# Altium PCB S4V_Motor_Driver_Board_V1.0_PCB.PcbDoc
Units mm, origin at the board's own origin, x right, y up, seen from the top; angles counter-clockwise.
Board outline 50 x 47.75 mm, 2 copper layers (Top Layer, Bottom Layer); 56 components, 38 nets, 268 pads, 245 vias.
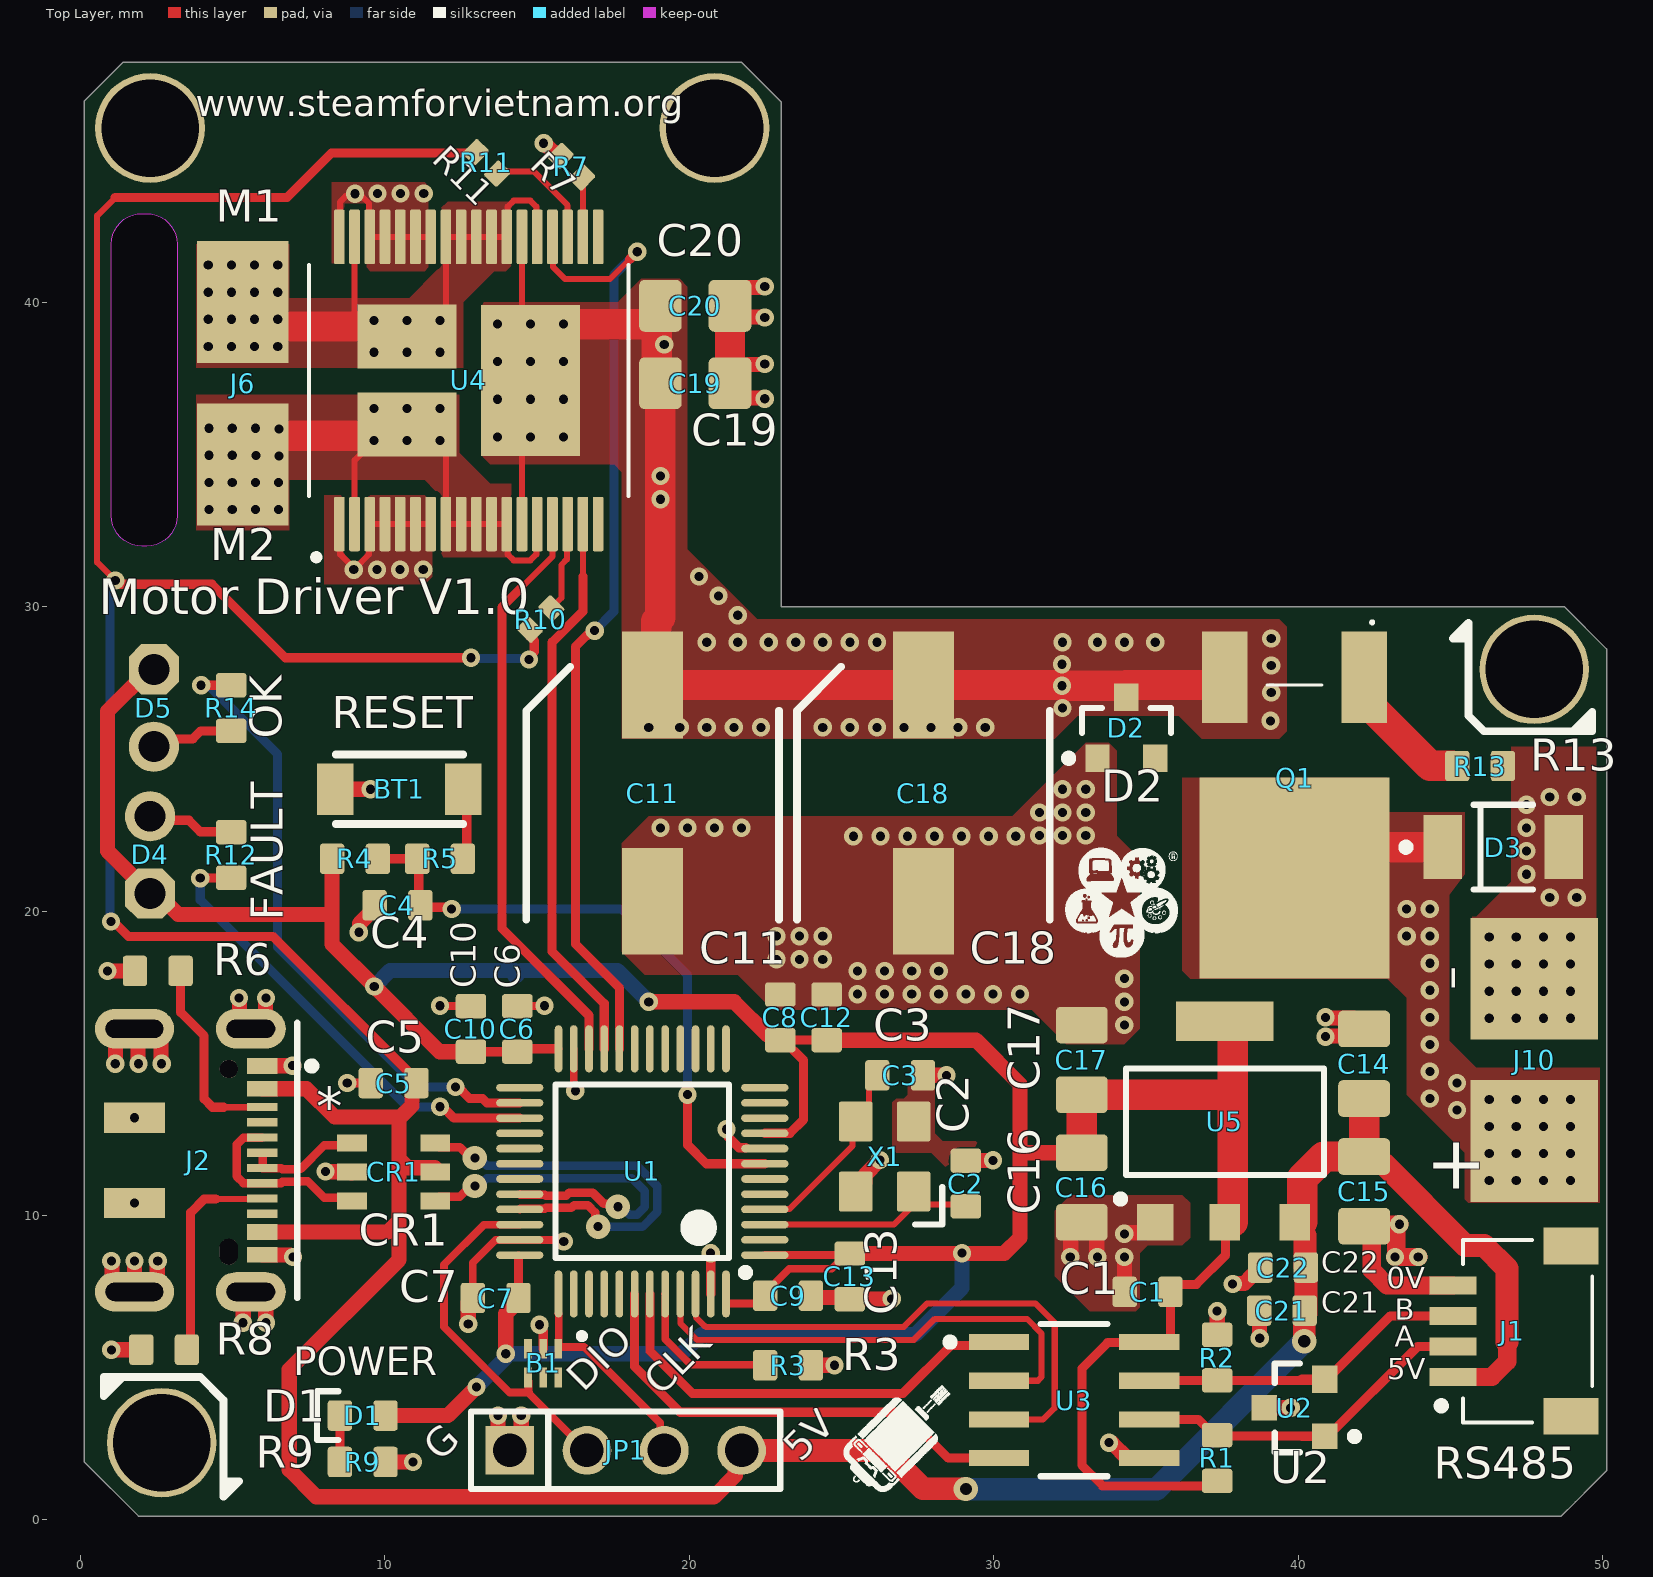
[diagram p0: Top Layer view]
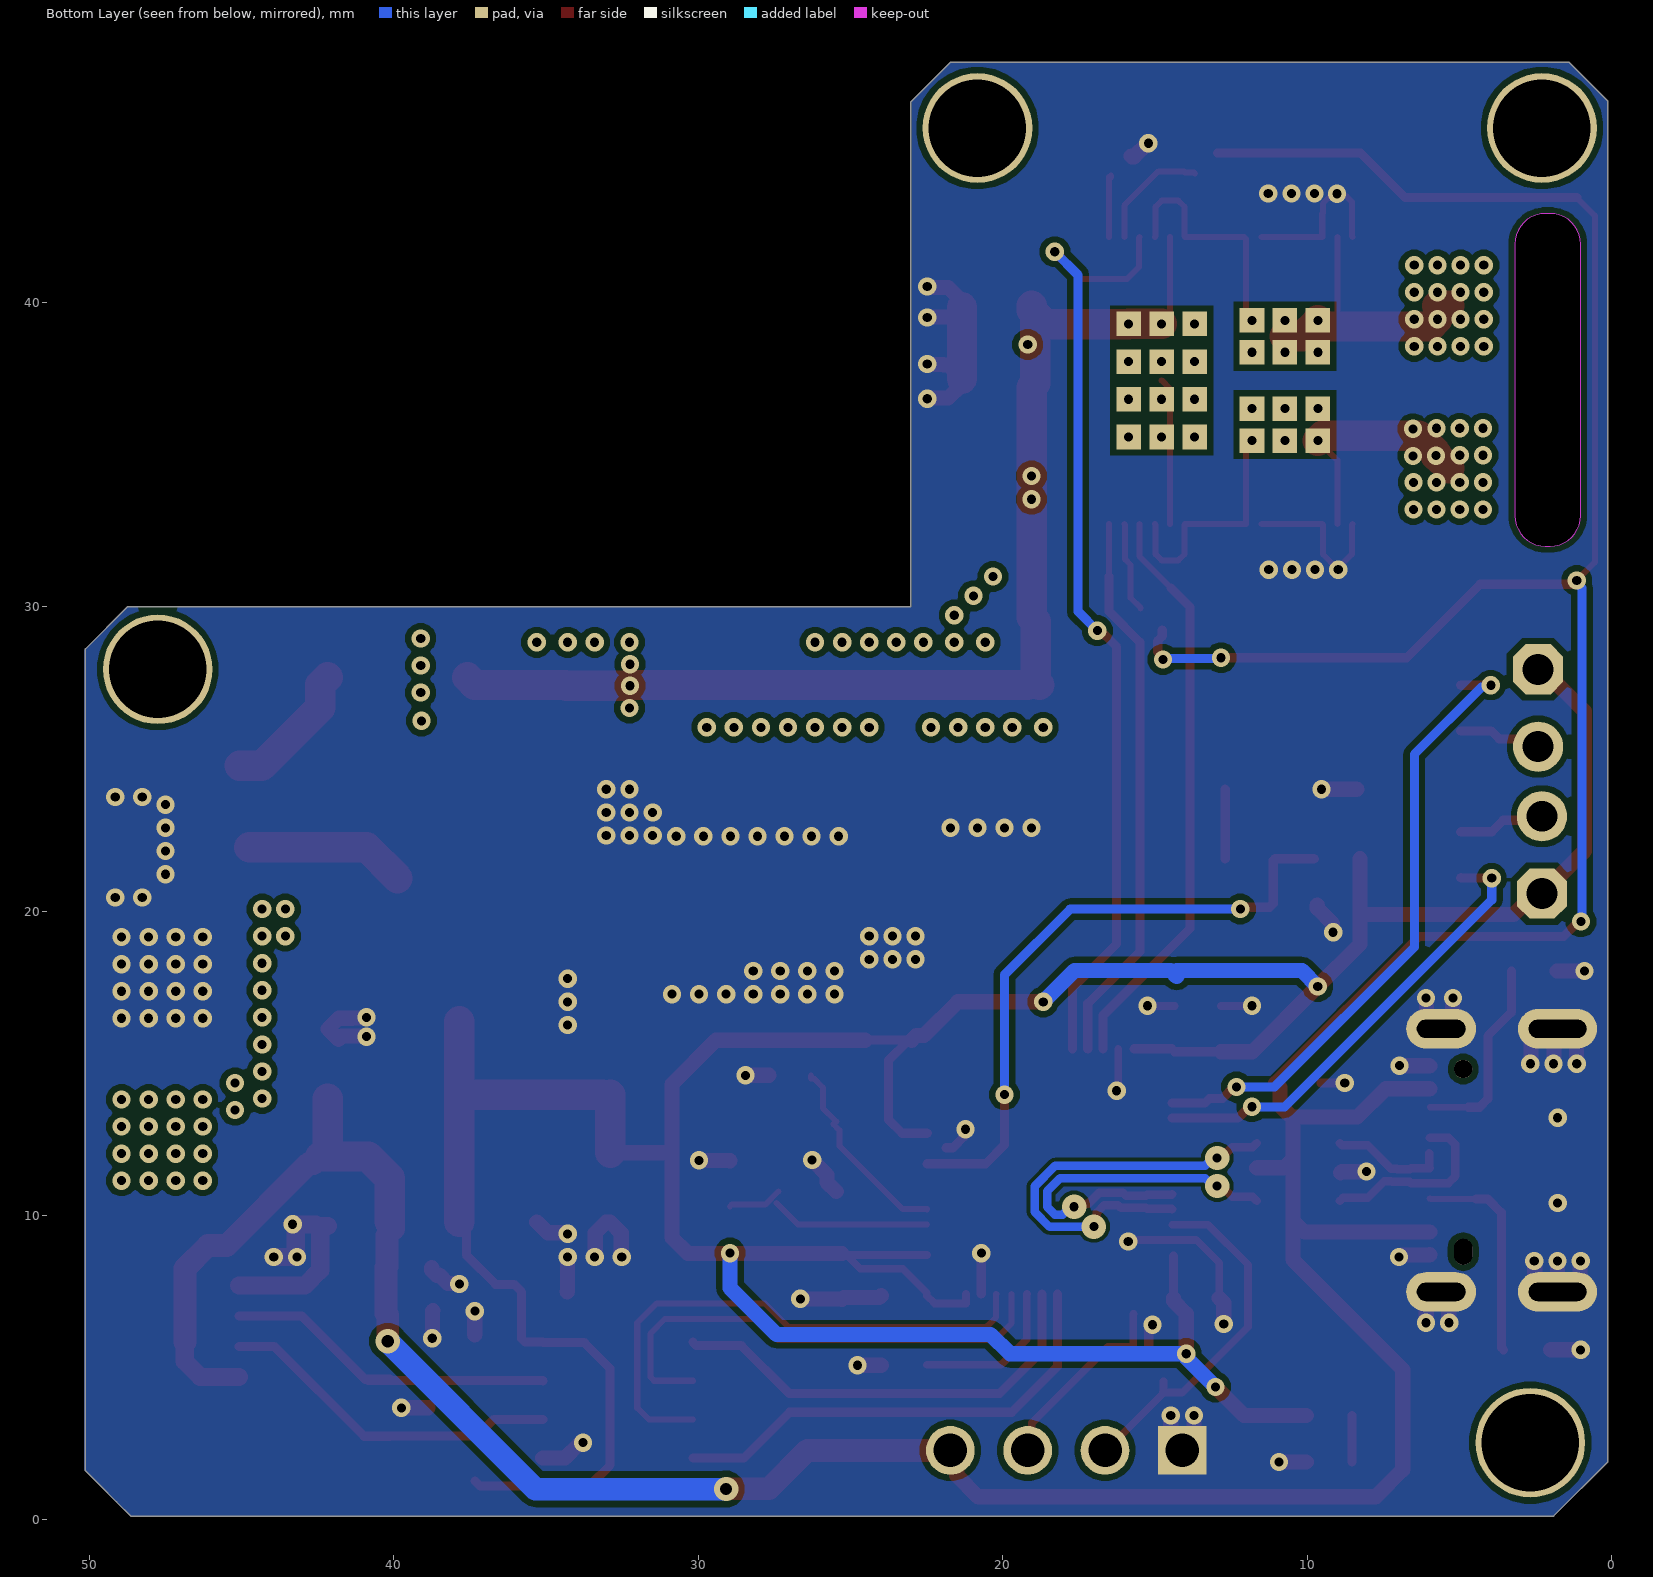
[diagram p1: Bottom Layer view, seen from below]
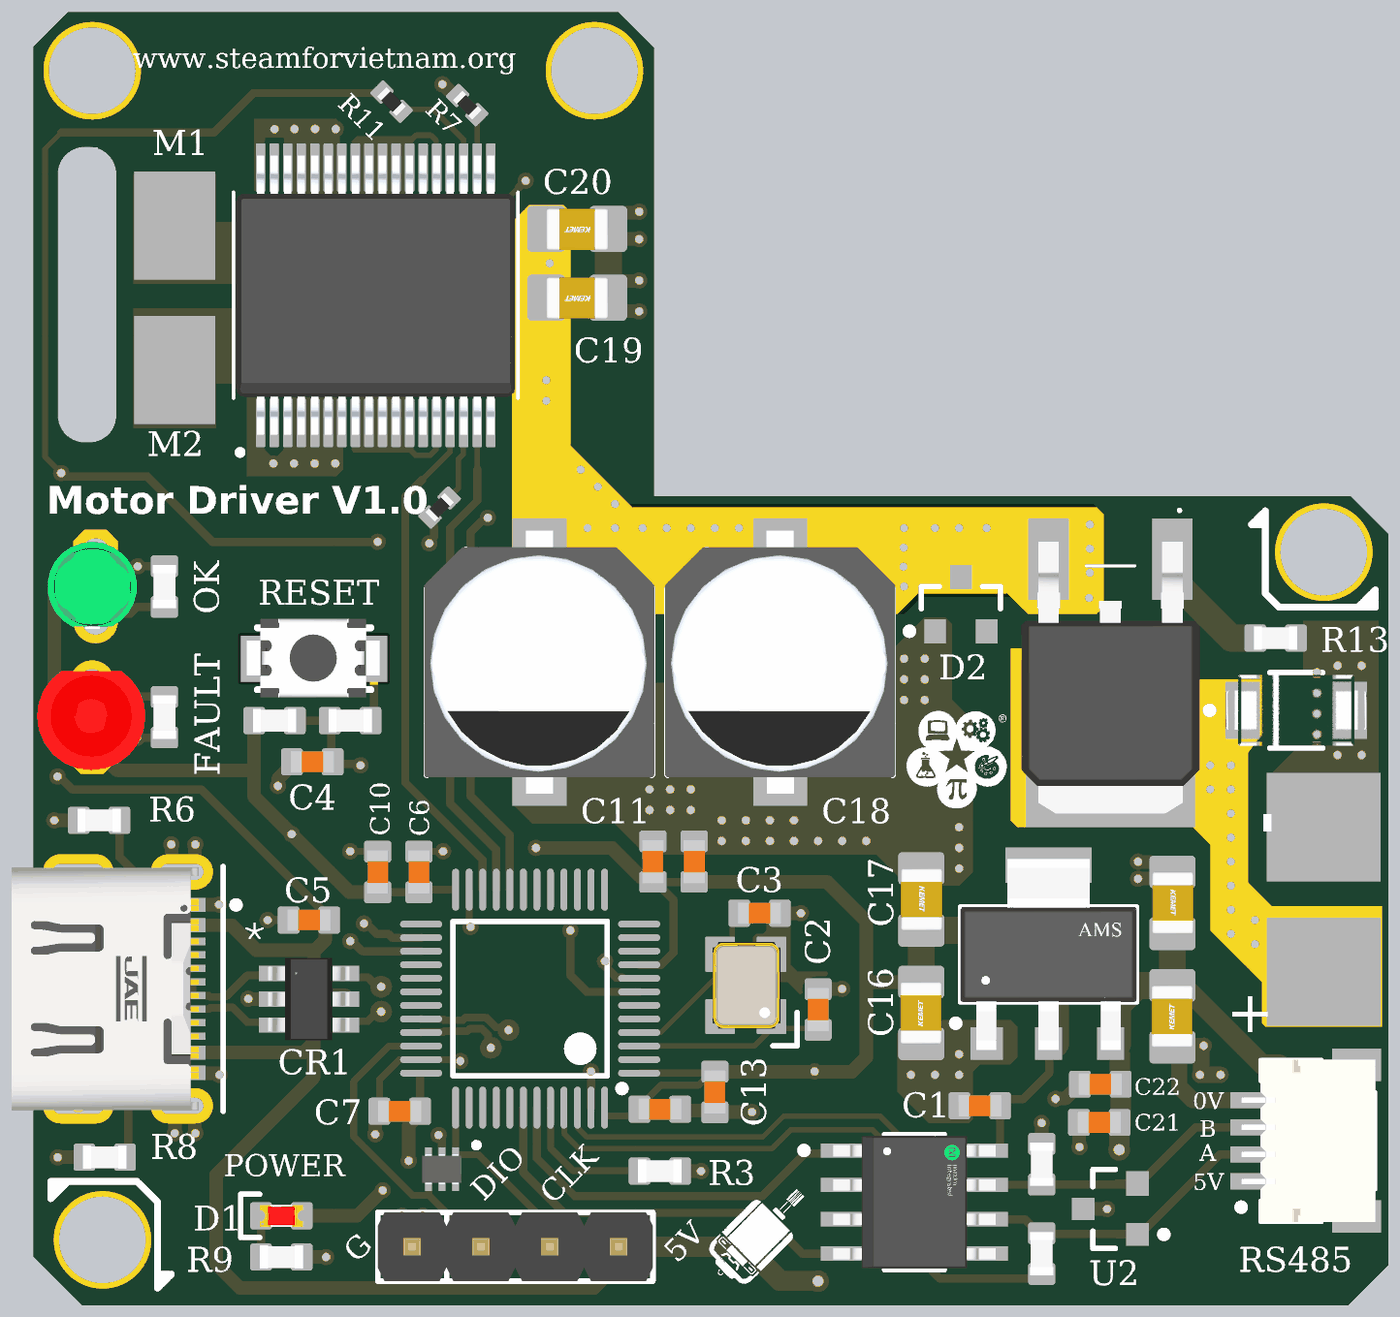
[diagram p2: 3D render of the assembled board from above, using the file's embedded part models]

## Layer stack, top to bottom
Top Solder: solder mask 0.0102, Solder Resist, Dk 3.5
Top Layer: signal copper 0.0356
Dielectric 1: dielectric 0.32, FR-4, Dk 4.8
Bottom Layer: signal copper 0.0356
Bottom Solder: solder mask 0.0102, Solder Resist, Dk 3.5

## Board outline
0.127,1.905 0.127,46.609 1.397,47.879 21.717,47.879 23.019,46.577 23.019,30 48.74,30 50.127,28.613 50.127,1.613 49.66,1.146 49.108,0.594 48.641,0.127 1.905,0.127
cut-out: 1.016,32.988 1.016,41.91 cw(c2.016,41.91) 2.016,42.91 2.175,42.91 cw(c2.175,41.91) 3.175,41.91 3.175,32.988 cw(c2.175,32.988) 2.175,31.988 2.016,31.988 cw(c2.016,32.988)

## Design rules (kind name [scope] priority, off if disabled: settings)
Clearance Clearance_1 [InDifferentialPairClass('90R')] p1: gap=0.12 ignorepadtopadclearanceinfootprint=TRUE
Clearance [All] p2: gap=0.2 ignorepadtopadclearanceinfootprint=TRUE
DiffPairsRouting DiffPairsRouting_1 [InDifferentialPairClass('90R')] p1: maxlimit=0.127 minlimit=0.127 mostfreqgap=0.127 toplayer_minwidth=0.279 toplayer_maxwidth=0.279 toplayer_prefwidth=0.279 bottomlayer_minwidth=0.279 bottomlayer_maxwidth=0.279 bottomlayer_prefwidth=0.279 impedanceprofiledriven=TRUE impedanceprofileid={57C8B4DE-B7C6-4E95-BCAA-B53FFCE73081} impedanceprofilevalue=90.000000 maxuncoupledlength=12.7
DiffPairsRouting [All] p2: maxlimit=0.254 minlimit=0.254 mostfreqgap=0.254 toplayer_minwidth=0.381 toplayer_maxwidth=0.381 toplayer_prefwidth=0.381 bottomlayer_minwidth=0.381 bottomlayer_maxwidth=0.381 bottomlayer_prefwidth=0.381 maxuncoupledlength=12.7
HoleSize [All] p1: absolutevalues=TRUE maxlimit=4 minlimit=0.025 maxpercent=80.000 minpercent=20.000
MinimumSolderMaskSliver [All] p1: minsoldermaskwidth=0.1
NetAntennae [NOT (InNet('+12V') OR InNet('VIN'))] p1: netantennaetolerance=3
PolygonConnect [All] p1: connectstyle=Direct reliefconductorwidth=0.254 reliefentries=4 polygonreliefangle="90 Angle" airgapwidth=0.254
RoutingVias [All] p1: holewidth=0.3 width=0.8 viastyle="Through Hole" minholewidth=0.2 minwidth=0.2 maxholewidth=0.4 maxwidth=1
SilkToSilkClearance [All] p1: silktosilkclearance=0.1
SilkToSolderMaskClearance [IsPad] p1: minsilkscreentomaskgap=0.1 clearancetoexposedcopper=TRUE
SolderMaskExpansion SolderMaskExpansion_1 [IsVia] p1: expansion=0.102 istentingtop=TRUE
SolderMaskExpansion [All] p2: expansion=0 istentingtop=FALSE
Width [All] p1: maxlimit=1.3 minlimit=0.2 preferedwidth=0.254
24 further rules are at their usual default settings.

## Classes and differential pairs
differential pair class 90R: USB_D USB_D_CON
differential pair USB_D: +USB_D_P -USB_D_N
differential pair USB_D_CON: +USB_D_CON_P -USB_D_CON_N

## Components (designator, comment, footprint, x,y, rotation, side; value= is the part's Value field where it differs from the comment)
B1 "ESDALC6V1-5M6" ESDALC6V15M6 15.2,5.15 r180 top
BT1 "Button_3x4mm_SMD" Button_3x4mm_SMD 12.573,24.003 r180 top
C1 "1uF" CAP_0603 35.052,7.493 r0 top
C2 "20pF" CAP_0603 29.083,11.049 r270 top
C3 "20pF" CAP_0603 26.924,14.605 r180 top
C4 "100nF" CAP_0603 10.414,20.193 r0 top
C5 "100nF" CAP_0603 10.287,14.351 r0 top
C6 "10uF" CAP_0603 14.351,16.129 r270 top
C7 "100nF" CAP_0603 13.639,7.29 r0 top
C8 "100nF" CAP_0603 22.987,16.51 r270 top
C9 "100nF" CAP_0603 23.241,7.366 r180 top
C10 "100nF" CAP_0603 12.827,16.129 r270 top
C11 "220uF" "tu nhom 8 (f)" 18.796,23.876 r270 top
C12 "1uF" CAP_0603 24.511,16.51 r270 top
C13 "100nF" CAP_0603 25.273,8.001 r90 top
C14 "10uF" CAP_0805#1 42.164,14.986 r270 top
C15 "100nF" CAP_0805#1 42.164,10.795 r90 top
C16 "10uF" CAP_0805#1 32.893,10.922 r90 top
C17 "100nF" CAP_0805#1 32.893,15.113 r270 top
C18 "220uF" "tu nhom 8 (f)" 27.686,23.876 r270 top
C19 "10uF" CAP_0805#2 20.193,37.338 r180 top
C20 "100nF" CAP_0805#2 20.193,39.878 r180 top
C21 "10uF" CAP_0603 39.465,6.877 r0 top
C22 "100nF" CAP_0603 39.501,8.291 r0 top
CR1 "USBLC6-2SC6" SOT23-6L_STM 10.287,11.43 r0 top
D1 "RED" LED_0603_RED 9.271,3.429 r0 top
D2 "SZBZX84C15ET3G" ONSC-SOT-23-3-318-08_V 34.356,26.019 r90 top
D3 "SMAJ15A" FP-SMA-MFG 46.736,22.098 r0 top
D4 "LED 3mm" LED-3MM-RED 2.286,20.574 r90 top
D5 "LED 3mm" LED-3MM-GREEN 2.413,27.94 r270 top
J1 "SM04B-SRSS-TB(LF)(SN)" JST_SM04B-SRSS-TB(LF)(SN) 45.085,6.199 r90 top
J2 "DX07S016JA3R1500" FP-DX07S016JA3R1500-MFG 2.921,11.811 r270 top
J6 "PAD_HANDSOLDER" PCBComponent_1#1 4.953,37.211 r90 top
J10 "PAD_HANDSOLDER" PCBComponent_1#2 47.371,14.986 r90 top
JP1 "JP 1x04" "JP 1x4 DT" 14.097,2.286 r0 top
Q1 "AOD409" AOD409 39.878,24.384 r180 top
R1 "1k" RES_0603 37.338,2.032 r90 top
R2 "1k" RES_0603 37.338,5.334 r270 top
R3 "10k" RES_0603 23.241,5.08 r0 top
R4 "10k" RES_0603 9.017,21.717 r180 top
R5 "330" RES_0603 11.811,21.717 r0 top
R6 "5.1k" RES_0603 2.54,18.034 r180 top
R7 "1k" RES_0402 16.129,44.45 r315 top
R8 "5.1k" RES_0603 2.747,5.594 r180 top
R9 "1k" RES_0603 9.271,1.905 r0 top
R10 "1k" RES_0402 15.113,29.591 r225 top
R11 "1k" RES_0402 13.335,44.577 r135 top
R12 "1k" RES_0603 4.953,21.844 r270 top
R13 "1k" RES_0603 45.974,24.765 r180 top
R14 "1k" RES_0603 4.953,26.67 r90 top
U1 "STM32F103C8T6" STM-LQFP48_L 18.454,11.45 r180 top
U2 "PSM712-LF-T7" PRKT-SOT23-3_V 39.878,3.683 r180 top
U3 "MAX3485ESA+" FP-S8-5-MFG 32.639,3.937 r0 top
U4 "VNH5050A-E" SOP50P1030X247-39N 12.753,37.429 r90 top
U5 "AMS1117-3.3" FP-AMS1117-IPC_C 37.592,13.081 r90 top
X1 "8MHz" XTAL_3225 26.416,11.938 r90 top

## Footprints (in the part's own frame and the unit in brackets; to place one, negate y for a bottom-side part, rotate by r counter-clockwise, add the part's x,y. Pads: shape width x height; smd on the part's side, far side on the other; paste and mask are expansions set on the pad)
AOD409 [mm]
  rect 1.5x3 smd: 1(-2.286,-3.3) 3(2.286,-3.3)
  rect 6.25x6.6 smd: 2(0,3.3)
  silkscreen extent -2.6,-5.15 0.9,-3.05, body extent -3.29,-3.94 3.29,6.1, height 2.3
Button_3x4mm_SMD [mm]
  rect 1.2x1.7 smd mask+0.102: 1(0,0) 2(4.2,0)
  silkscreen extent 0,-1.14 4.19,1.14, body extent -0.33,-1.48 4.58,1.42, height 2.01
CAP_0603 [mm]
  rrect25% 0.8x1 smd: 1(-0.75,0) 2(0.75,0)
  body extent -0.8,-0.4 0.8,0.4, height 0.51
CAP_0805#1 [mm]
  rrect25% 1.2x1.7 smd: 1(-1.143,0) 2(1.143,0)
  body extent -1.15,-0.76 1.15,0.79, height 1.01
CAP_0805#2 [mm]
  rrect25% 1.4x1.7 smd: 1(-1.143,0) 2(1.143,0)
  body extent -1.15,-0.76 1.15,0.79, height 1.01
ESDALC6V15M6 [mm]
  rect 0.25x0.65 smd: 1(-0.5,-0.475) 2(0,-0.475) 3(0.5,-0.475) 4(0.5,0.475) 5(0,0.475) 6(-0.5,0.475)
  silkscreen extent -1.37,-0.99 -1.17,-0.79, body extent -0.72,-0.55 0.72,0.55, height 0.65
FP-AMS1117-IPC_C [mm]
  rect 1.2x1.2 smd paste+0 mask+0: 1(-3.295,2.29)
  rect 1.2x1 smd paste+0 mask+0: 2(-3.295,0) 3(-3.295,-2.29)
  rect 1.3x3.2 smd paste+0 mask+0: 4(3.295,0)
  silkscreen extent -2.66,-3.25 1.75,3.55, body extent -3.9,-3.35 3.9,3.35, height 0.25
FP-DX07S016JA3R1500-MFG [mm]
  rrect100% 1.3x2.3 hole 1.6 slot 0.6 at 0 deg paste-2539.97 mask+0: 1(-4.32,2.675) 2(4.32,2.675)
  rrect100% 1.3x2.6 hole 1.9 slot 0.6 at 0 deg paste-2539.97 mask+0: 3(-4.32,-1.15) 6(4.32,-1.15)
  rect 1x2 smd paste+0 mask+0: 4(-1.4,-1.15) 5(1.4,-1.15)
  rect 0.52x1 smd paste+0 mask+0: A1/B12(-3.1,3.05) A4/B9(-2.35,3.05) A12/B1(3.1,3.05) B4/A9(2.35,3.05)
  rect 0.27x1 smd paste+0 mask+0: A5(-1.75,3.05) A6(-0.25,3.05) A7(0.75,3.05) A8(1.75,3.05) B5(1.25,3.05) B6(0.25,3.05) B7(-0.75,3.05) B8(-1.25,3.05)
  round 0.6 hole 0.6 unplated paste-2539.97 mask+0: ""(-3,1.95)
  rrect100% 0.85x0.6 hole 0.6 slot 0.85 at 0 deg unplated paste-2539.97 mask+0: ""(3,1.95)
  silkscreen extent -4.52,4.2 4.52,4.8, body extent -5.07,-3.9 5.07,3.92, height 0.25
FP-S8-5-MFG [mm]
  rect 1.98x0.53 smd paste+0 mask+0: 1(-2.465,1.905) 2(-2.465,0.635) 3(-2.465,-0.635) 4(-2.465,-1.905) 5(2.465,-1.905) 6(2.465,-0.635) 7(2.465,0.635) 8(2.465,1.905)
  silkscreen extent -4.2,-2.5 1.1,2.5, body extent -3.55,-2.75 3.55,2.75, height 0.25
FP-SMA-MFG [mm]
  rect 1.27x2.1 smd paste+0 mask+0: 1(-1.985,0) 2(1.985,0)
  silkscreen extent -3.32,-1.4 0.97,1.4, body extent -2.72,-1.5 2.72,1.5, height 0.25
"JP 1x4 DT" [mm] "4 pins, 1 row, straight, gold plating"
  rect 1.6x1.6 hole 1.1: 1(0,0)
  round 1.6 hole 1.1: 2(2.54,0) 3(5.08,0) 4(7.62,0)
  silkscreen extent -1.27,-1.27 8.89,1.27, body extent -1.27,-1.27 8.89,1.27, height 8.54
JST_SM04B-SRSS-TB(LF)(SN) [mm]
  rect 0.6x1.55 smd: 1(-1.5,0) 2(-0.5,0) 3(0.5,0) 4(1.5,0)
  rect 1.2x1.8 smd: S1(-2.8,-3.875) S2(2.8,-3.875)
  silkscreen extent -3,-4.57 3,0.48, body extent -3,-4.57 3,0.38, height 3.25
LED-3MM-GREEN [mil]
  oct 65x65 hole 40: 1(0,0)
  round 65 hole 40: 2(100,0)
  body extent -15,-70 112,60, height 182
LED-3MM-RED [mil]
  oct 65x65 hole 40: 1(0,0)
  round 65 hole 40: 2(100,0)
  body extent -27,-77 117,80, height 181
LED_0603_RED [mm]
  rrect25% 0.8x1 smd: A(0.75,0) K(-0.75,0)
  silkscreen extent -1.5,-0.8 -0.8,0.8, body extent -0.8,-0.4 0.8,0.4, height 0.6
ONSC-SOT-23-3-318-08_V [mm] "SOT23, 3-Leads, Body 2.92x1.3mm, Pitch 0.95mm"
  rect 0.9x0.8 smd: 1(-1,0.95) 2(-1,-0.95) 3(1,0)
  silkscreen extent -1.12,-1.46 0.65,2.02, body extent -0.65,-1.46 0.65,1.46, height 1.11
PCBComponent_1#1 [mm]
  rect 4x3 smd: 1(-2.54,-0.381) 2(2.794,-0.381)
PCBComponent_1#2 [mm]
  rect 4x4.2 smd: 1(-2.54,-0.381) 2(2.794,-0.381)
PRKT-SOT23-3_V [mm] "SOT23, 3-Leads, Body 2.92x1.3mm, Pitch 0.94mm"
  rect 0.84x0.84 smd: 1(-1,0.94) 3(1,0)
  rect 0.84x0.9 smd: 2(-1,-0.94)
  silkscreen extent -2.09,-1.46 0.65,1.46, body extent -0.65,-1.46 0.65,1.46, height 1.17
RES_0402 [mm]
  rrect25% 0.6x0.7 smd: 1(-0.5,0) 2(0.5,0)
  body extent -0.5,-0.25 0.5,0.25, height 0.3
RES_0603 [mm]
  rrect25% 0.8x1 smd: 1(-0.75,0) 2(0.75,0)
  body extent -0.8,-0.43 0.8,0.43, height 0.52
SOP50P1030X247-39N [mm]
  rrect25% 1.79x0.35 smd: 1(-4.715,4.25) 2(-4.715,3.75) 3(-4.715,3.25) 4(-4.715,2.75) 5(-4.715,2.25) 6(-4.715,1.75) 7(-4.715,1.25) 8(-4.715,0.75) 9(-4.715,0.25) 10(-4.715,-0.25) 11(-4.715,-0.75) 12(-4.715,-1.25) 13(-4.715,-1.75) 14(-4.715,-2.25) 15(-4.715,-2.75) 16(-4.715,-3.25) 17(-4.715,-3.75) 18(-4.715,-4.25) 19(4.715,-4.25) 20(4.715,-3.75) 21(4.715,-3.25) 22(4.715,-2.75) 23(4.715,-2.25) 24(4.715,-1.75) 25(4.715,-1.25) 26(4.715,-0.75) 27(4.715,-0.25) 28(4.715,0.25) 29(4.715,0.75) 30(4.715,1.25) 31(4.715,1.75) 32(4.715,2.25) 33(4.715,2.75) 34(4.715,3.25) 35(4.715,3.75) 36(4.715,4.25)
  rect 2.1x3.25 smd paste-3: 37(1.45,2.025) 38(-1.45,2.025)
  rect 0.808x0.808 / inner round 0.808 / far side rect 0.808x0.808 hole 0.3: 37_1(1.975,0.942) 37_2(0.925,0.942) 37_3(1.975,2.025) 37_4(0.925,2.025) 37_5(1.975,3.108) 37_6(0.925,3.108) 38_1(-0.925,0.942) 38_2(-1.975,0.942) 38_3(-0.925,2.025) 38_4(-1.975,2.025) 38_5(-0.925,3.108) 38_6(-1.975,3.108) 39_1(1.856,-3.108) 39_2(0.619,-3.108) 39_3(-0.619,-3.108) 39_4(-1.856,-3.108) 39_5(1.856,-2.025) 39_6(0.619,-2.025) 39_7(-0.619,-2.025) 39_8(-1.856,-2.025) 39_9(1.856,-0.942) 39_10(0.619,-0.942) 39_11(-0.619,-0.942) 39_12(-1.856,-0.942)
  rect 4.95x3.25 smd paste-3: 39(0,-2.025)
  silkscreen extent -5.91,-5.25 3.8,5.25, body extent -5.15,-5.15 5.15,5.15, height 2.47
SOT23-6L_STM [mil]
  rect 38.5x22 smd paste+0 mask+0: 1(-53.75,37.4) 2(-53.75,0) 3(-53.75,-37.4) 4(53.75,-37.4) 5(53.75,0) 6(53.75,37.4)
  body extent -59,-60 59,60, height 57
STM-LQFP48_L [mm] "QFP, 48-Leads, Body 7x7mm, Pitch 0.5mm, IPC High Density"
  oval 1.55x0.25 smd: 1(-4.025,2.75) 2(-4.025,2.25) 3(-4.025,1.75) 4(-4.025,1.25) 5(-4.025,0.75) 6(-4.025,0.25) 7(-4.025,-0.25) 8(-4.025,-0.75) 9(-4.025,-1.25) 10(-4.025,-1.75) 11(-4.025,-2.25) 12(-4.025,-2.75) 25(4.025,-2.75) 26(4.025,-2.25) 27(4.025,-1.75) 28(4.025,-1.25) 29(4.025,-0.75) 30(4.025,-0.25) 31(4.025,0.25) 32(4.025,0.75) 33(4.025,1.25) 34(4.025,1.75) 35(4.025,2.25) 36(4.025,2.75)
  oval 0.25x1.55 smd: 13(-2.75,-4.025) 14(-2.25,-4.025) 15(-1.75,-4.025) 16(-1.25,-4.025) 17(-0.75,-4.025) 18(-0.25,-4.025) 19(0.25,-4.025) 20(0.75,-4.025) 21(1.25,-4.025) 22(1.75,-4.025) 23(2.25,-4.025) 24(2.75,-4.025) 37(2.75,4.025) 38(2.25,4.025) 39(1.75,4.025) 40(1.25,4.025) 41(0.75,4.025) 42(0.25,4.025) 43(-0.25,4.025) 44(-0.75,4.025) 45(-1.25,4.025) 46(-1.75,4.025) 47(-2.25,4.025) 48(-2.75,4.025)
  silkscreen extent -3.52,-2.85 2.85,3.45, body extent -3.5,-3.5 3.5,3.5, height 1.6
"tu nhom 8 (f)" [mm]
  rect 3.5x2 smd: 1(-3.55,0) 2(3.55,0)
  silkscreen extent -4.15,-4.15 4.15,4.15, body extent -4.85,-4.25 4.85,4.25, height 10.5
XTAL_3225 [mm]
  rrect10% 1.3x1.1 smd: 1(-1.15,-0.95) 2(1.15,-0.95) 3(1.15,0.95) 4(-1.15,0.95)
  silkscreen extent -2.23,-1.89 -1,-1, body extent -1.6,-1.28 1.6,1.23, height 0.61

## Part data
B1: "STMicroelectronics ESDALC6V1-5M6 Quint Uni-Directional TVS Diode, 30W peak, 6-Pin uQFN", Manufacturer_Name=STMicroelectronics, Mouser Part Number=511-ESDALC6V1-5M6, Arrow Part Number=ESDALC6V1-5M6, Arrow Price/Stock=https://www.arrow.com/en/products/esdalc6v1-5m6/stmicroelectronics?utm_currency=USD&region=nac, Datasheet Link=https://www.st.com/resource/en/datasheet/esdalc6v1-5m6.pdf, Geometry.Height=0.65mm, Manufacturer_Part_Number=ESDALC6V1-5M6, Mouser Price/Stock=https://www.mouser.co.uk/ProductDetail/STMicroelectronics/ESDALC6V1-5M6?qs=riAxU6JNBCsF7CaldDOuJw%3D%3D
BT1: "Button SMD 3x4mm 2 Pins"
C1 C2 C3 C4 C5 C6 C7 C8 C9 C10 C12 C13 C21 C22: library part CAP_0603, "Capacitor SMD 0603"
C11 C18: library part "Tu Nhom 220uF 25V", "Dán", Chung_Loai=Dán, Don_Vi=Con, Ma_Hang=MH002221, So_Chan=2, Ten_Linh_Kien="Tụ Nhôm 220uF 25V"
C14 C15 C16 C17 C19 C20: library part CAP_0805, "Capacitor SMD 0805"
CR1: "ESD Protection for USB 2.0 High Speed", Manufacturer_Name=STMicroelectronics, Copyright="Copyright (C) 2025 Ultra Librarian. All rights reserved.", Manufacturer_Part_Number=USBLC6-2SC6, RefDes=RefDes, Type=Type
D1: library part LED_0603_RED, "LED 0603 RED SMD"
D2: library part CMP-1060-00853-1, "Zener Voltage Regulator, 225 mW, 3-Pin SOT-23, Pb-Free, Tape and Reel", Manufacturer="On Semiconductor", ComponentLink1Description="Manufacturer URL", ComponentLink1URL=http://www.onsemi.com/, ComponentLink2Description=Datasheet, ComponentLink2URL=http://www.onsemi.com/pub_link/Collateral/BZX84C2V4ET1-D.PDF, ComponentLink3Description="Package Specification", ComponentLink3URL=http://www.onsemi.cn/pub_link/Collateral/318-08.PDF, DatasheetVersion="Rev. 8", Mounting Technology="Surface Mount", PackageDescription="3-Pin Small Outline Transistor, Body 2.92 x 1.3 mm, Pitch 0.95 mm", PackageReference=SOT-23-3-318-08, PackageVersion="Rev. AP, 11/2009", Packing="Tape and Reel", PartNumber=SZBZX84C15ET3G, RoHS=Pb-Free
D3: library part CMP-07401-000026-1, "TVS DIODE 15V 24.4V SMA", Breakdown Voltage=16.7V, Clamping Voltage=24.4V, Manufacturer="Bourns Inc.", Max Junction Temp=+150°C, Package=SMA, Peak Pulse Current=16.4A, Peak Pulse Power=400W, Reverse Standoff Voltage=15V, Temperature="-55°C to +150°C", Temperature Range Low=-55°C, Automotive=No, Category=Diode, ComponentLink2Description=Datasheet, ComponentLink2URL=https://www.bourns.com/docs/Product-Datasheets/SMAJ.pdf, Device Class L1="Circuit Protection", Device Class L2="TVS Diodes", Device Class L3=unset, Digikey Description="TVS DIODE 15V 24.4V SMA", Direction=Unidirectional, Height=2.29mm, Lead Free=Yes, Manufacturer Part Number=SMAJ15A, Mouser Description="Bourns Smaj15a / Diode Tvs 15v 400w Uni 5% Smd Bourns", Number Of Channels=1, Octopart=https://octopart.com/smaj15a-bourns-12809353, RoHS=TRUE, Temperature Range High=+150°C
D4: library part "LED 3mm Do", "Cắm", Chung_Loai=Cắm, Don_Vi=Con, Ma_Hang=MH003892, Ten_Linh_Kien="Led 3MM Phủ Đỏ (10c)"
D5: library part "LED 3mm Xanh La", "Cắm", Chung_Loai=Cắm, Don_Vi=Con, Ma_Hang=MH001054, Ten_Linh_Kien="Led 3MM Phủ Xanh (10c)"
J1: "Connector Header Surface Mount, Right Angle 4 position 0.039 (1.00mm)", Package=None, Check_prices=https://www.snapeda.com/parts/SM04B-SRSS-TB(LF)(SN)/JST/view-part/?ref=eda, MF="JST Sales", MP=SM04B-SRSS-TB(LF)(SN), SnapEDA_Link=https://www.snapeda.com/parts/SM04B-SRSS-TB(LF)(SN)/JST/view-part/?ref=snap
J2: library part CMP-19038-000002-1, "CONN RCP USB2.0 TYP C 24P SMD RA"
J6 J10: "HandSolder Pad for PWR IN"
JP1: library part "JP 1x4 2.54 Duc Thang", "Cắm", Chung_Loai=Cắm, Don_Vi=Con, Ma_Hang=MH000903, Ten_Linh_Kien="Jump Đơn Đực 2.54MM 1x40P Thẳng 11MM"
Q1: "60V P-Channel MOSFET", Manufacturer_Name="Alpha & Omega Semiconductors", Arrow Part Number=AOD409, Arrow Price/Stock=https://www.arrow.com/en/products/aod409/alpha-and-omega-semiconductor?region=nac, Datasheet Link=http://www.aosmd.com/res/data_sheets/AOD409.pdf, Geometry.Height=2.4mm, Manufacturer_Part_Number=AOD409
R1 R2 R3 R4 R5 R6 R8 R9 R12 R13 R14: library part RES_0603, "Resistor SMD 0603"
R7 R10 R11: library part RES_0402, "Resistor SMD 0402"
U1: library part CMP-0237-00215-3, "ARM Cortex-M3 32-bit MCU, 64 KB Flash, 20 KB Internal RAM, 37 I/Os, 48-pin LQFP, -40 to 85 degC, Tray", I/Os (High Current)=37, Operating Frequency(F) (Processor speed) (MHz)=72, Supply Voltage(Vcc) min (V)=2, A/D Converter="2x12-bit (10 Channel)", ComponentLink1Description="Manufacturer URL", ComponentLink1URL=http://www.st.com/web/en/home.html, ComponentLink2Description=Datasheet, ComponentLink2URL=http://www.st.com/st-web-ui/static/active/en/resource/technical/document/datasheet/CD00161566.pdf, ComponentLink3Description="Package Specification", ComponentLink3URL=http://www.st.com/st-web-ui/static/active/en/resource/technical/document/datasheet/DM00058181.pdf, Core="ARM Cortex-M3", DatasheetVersion="Rev. 16", FLASH Size (Prog) (kB)=64, Internal RAM Size (kB)=20, Mounting Technology="Surface Mount", PackageDescription="48-Pin Low Profile Quad Flat Package, 7 x 7 mm Body, 0.5 mm Pitch", PackageReference=LQFP48, PackageVersion="Rev. 6, 06/2013", Packing=Tray, PartNumber=STM32F103C8T6
U2: library part CMP-2000-07553-1, "TVS Array - Asymmetrical Data Line Protector, 600 W, 7.5 V, -55 to 150 degC, 3-Pin SOT23, RoHS, Tape and Reel", Capacitance=75pF, Case\/Package=SOT-23, Clamping Voltage=17V, Current=20uA, Manufacturer="Protek Devices", Max Operating Temperature=150degC, Min Breakdown Voltage=7.5V, Min Operating Temperature=-55degC, Package Description="3-Pin Small Outline Transistor, Body 2.92 x 1.3 mm, Pitch 0.94 mm", Package Reference=SOT23-3, Power Dissipation=600W, Voltage=12V, Working Voltage=7V, Datasheet URL=www.protekdevices.com/xyz/documents/datasheets/psm712.pdf, Datasheet Version=10/2013, Depth=1.4mm, Direction=Bidirectional, Element Configuration=Dual, Lead Free=LeadFree, Leakage Current=20uA, Length=3.04mm, Manufacturer URL=http://www.protekdevices.com/, Mounting Technology=SurfaceMount, Number of Pins=3, Packaging=TapeandReel, Radiation Hardening=No, RoHSCompliant=True
U3: library part CMP-05679-000038-1, "IC TXRX RS485/422 10MBPS 8SOIC", Manufacturer="Maxim Integrated", Manufacturer Part Number=MAX3485EESA+, Max Supply Voltage=3.6V, Min Supply Voltage=3V, Nominal Supply Current=0.95-1.1mA, Package=S8-5, Temperature="-40°C to +85°C", Temperature Range High=+85°C, Temperature Range Low=-40°C, Automotive=No, Category=IC, ComponentLink2Description=Datasheet, ComponentLink2URL=https://datasheets.maximintegrated.com/en/ds/MAX3483E-MAX3491E.pdf, Data Rate=15Mbits/s, Device Class L1="Integrated Circuits (ICs)", Device Class L2="Interface ICs", Device Class L3="RS-232 / RS-422 / RS-485 Interface ICs", Digikey Description="IC TXRX RS485/422 10MBPS 8SOIC", Footprint Url=https://pdfserv.maximintegrated.com/land_patterns/90-0096.PDF, Height=1.75mm, Interface=RS-485,RS-422, Lead Free=Yes, Mouser Description="RS-422/RS-485 Interface IC 3.3V 12Mbps Transceiver", Number Of Receivers=1, Number Of Transmitters=1, Octopart=https://octopart.com/max3485eesa%2B-maxim+integrated-39731903, RoHS=TRUE, Simplex Duplex="Half Duplex", Standoff Height=0.1mm
U4: "- Motor Driver Power MOSFET Parallel, PWM PowerSSO-36 TP", Package="BFSOP-36 STMicroelectronics", Check_prices=https://www.snapeda.com/parts/VNH5050A-E/STMicroelectronics/view-part/?ref=eda, MF=STMicroelectronics, MP=VNH5050A-E, SnapEDA_Link=https://www.snapeda.com/parts/VNH5050A-E/STMicroelectronics/view-part/?ref=snap
U5: library part CMP-209535-000001-1, "LDO Voltage Regulators 1A, 3.3V", Dropout Voltage=1.1V, Manufacturer="Advanced Monolithic Systems", Max Junction Temp=+125°C, Max Power Dissipation=1.2W, Max Supply Voltage=15V, Nominal Supply Current=5mA, Output Current=1A, Output Voltage=3.3V, Package=AMS1117, Temperature="-40°C to +125°C", Temperature Range Low=-40°C, Automotive=No, Category=IC, ComponentLink2Description=Datasheet, ComponentLink2URL=http://www.advanced-monolithic.com/pdf/ds1117.pdf, Device Class L1="Integrated Circuits (ICs)", Device Class L2="Power Management ICs", Device Class L3="Voltage Regulators - Linear", Height=1.8mm, Ipc Land Pattern Name=SOT229P700X180-4, Lead Free=Yes, Manufacturer Part Number=AMS1117-3.3, Number Of Outputs=1, Octopart=https://octopart.com/ams1117-3.3-advanced+monolithic+systems-25899300, Output Type=Fixed, RoHS=TRUE, Standoff Height=0.64mm, Temperature Range High=+125°C
X1: library part TSX-3225_24.0000MF15X-AC, "Crystal SMD 24MHz 10PPM 7pF 3225", Manufacturer=Epson, Manufacturer Part Number="TSX-3225 24.0000MF15X-AC"

## Free pads (board coordinates)
  round 3.6 hole 3.2: 1(2.286,45.72) 1(2.667,2.54) 1(20.828,45.72) 1(47.752,27.94)

## Via types
v1: diameter 0.6, hole 0.3, Top Layer to Bottom Layer, tented both sides, 239 vias
v2: diameter 0.8, hole 0.3, Top Layer to Bottom Layer, tented both sides, 4 vias
v3: diameter 0.8, hole 0.4, Top Layer to Bottom Layer, tented both sides, 2 vias

## Nets (pads, with @x,y where several pads share a name; then routed paths per layer and width w, separated by ;. In a path a pad name is that pad's centre, name@x,y a point inside that pad or via, vN(x,y) a via of type N, cw(c..) or ccw(c..) an arc to the next point about the centre after c; other vN are vias at no path point)
+3.3V: C1.2 C6.2 C7.2 C8.2 C9.2 C10.2 C12.2 C13.2 C16.2 C17.2 D1.A D4.1 D5.1 R1.1 R4.2 U1.1 U1.9 U1.24 U1.36 U1.48 U3.8 U5.2 U5.4 | length 129.6
  Top Layer w0.254: U1.48 21.204,7.114 21.206,7.112 22.237,7.112 C9.2 22.491,7.466 23.28,8.255 24.677,8.255 C13.2@25.124,8.702 ; U1.1 22.481,8.702 C13.2@25.124,8.702 ; C13.2 25.173,8.751 C13.2@25.124,8.702
  Top Layer w0.3: C10.2 C6.2 14.447,15.475 U1.24@15.679,15.475 ; C7.2 U1.36@14.389,8.675 ; U1.9 23.301,12.7 23.749,13.148 23.749,15.098 C8.2@23.087,15.76 ; C8.2 C8.2@23.087,15.76 ; C12.2 C8.2@23.087,15.76 ; U3.8@35.086,5.824 33.746,5.824 32.893,4.971 32.893,1.801 33.577,1.117 37.173,1.117 R1.1 ; U3.8 35.687,5.842 35.802,5.957 C1.2 36.045,7.736 36.656,7.736 37.613,8.693 37.613,9.553 U5.2@37.846,9.786
  Top Layer w0.5: D5.1 2.265,27.94 0.889,26.564 0.889,21.971 D4.1 2.524,20.574 3.212,19.886 8.267,19.886 ; R4.2 8.267,19.886 ; D1.A 12.071,3.429 v1(13.01,4.369) ; C10.2 11.799,15.379 v1(9.652,17.526) 8.267,18.911 8.267,19.886 ; v1(13.97,5.461) 13.97,6.771 14.389,7.19 C7.2 ; v1(18.669,17.018) 21.476,17.018 22.584,15.91 22.837,15.91 C8.2 ; C12.2 29.413,15.76 30.861,14.312 30.861,12.065 ; C13.2 30.341,8.751 30.861,9.271 30.861,12.065 ; C16.2@33.147,12.065 C16.2 30.861,12.065
  Top Layer w1: C16.2 C17.2 ; C17.2@33.147,13.97 37.719,13.97 37.846,13.843 ; U5.2@37.846,9.786 37.846,13.843 ; U5.4@37.846,16.376 37.846,13.843
  Bottom Layer w0.5: v1(9.652,17.526) 10.171,18.045 14.284,18.045 ; v1(13.01,4.369) v1@13.951,5.309 ; v1(13.97,5.461) 19.762,5.461 20.397,6.096 27.432,6.096 28.956,7.62 v1(28.956,8.763) ; 14.284,17.851 14.478,18.045 17.642,18.045 v1(18.669,17.018)
+5V: C5.2 C14.2 C15.2 C21.2 C22.2 CR1.5 J1.1 J2.A4/B9 J2.B4/A9 JP1.4 R10.2 R11.2 U5.3 | length 148.4
  Top Layer w0.2: 1.143,43.434 0.548,42.839 0.548,31.456 v1@1.27,30.734 ; R11.2@12.946,44.895 R11.2
  Top Layer w0.3: v1(1.006,19.654) 1.088,19.654 1.573,19.168 6.32,19.168 11.037,14.451 C5.2 ; 1.143,43.434 6.779,43.434 8.241,44.895 R11.2@12.946,44.895 ; v1@1.27,30.734 4.318,30.734 6.731,28.321 v1(12.827,28.321) ; v1(14.733,28.264) 14.733,28.345 14.905,28.517 14.905,28.88 14.759,29.025 R10.2
  Top Layer w0.5: J2.B4/A9 10.096,9.461 10.461,9.826 ; J2.A4/B9 7.429,14.161 8.354,13.236 10.407,13.236 10.461,13.183 ; C5.2 10.887,14.201 10.887,13.609 10.461,13.183 ; CR1.5@11.652,11.557 11.641,11.568 10.754,11.568 10.461,11.861 ; JP1.4 21.507,2.076 21.507,1.463 20.804,0.76 7.749,0.76 6.858,1.651 6.858,4.942 10.461,8.545 10.461,9.826 ; 10.461,9.826 10.461,11.861 ; 10.461,11.861 10.461,13.183
  Top Layer w0.6: J1.1 46.355,4.699 46.863,5.207 46.863,5.842
  Top Layer w0.75: JP1.4 26.416,2.286 27.676,1.026 29.073,1.026 v3(29.083,1.016) ; U5.3@40.007,9.684 40.007,9.561 40.226,9.342 40.226,8.316 C22.2 40.251,6.787 40.2,6.736 v3(40.2,5.867) ; U5.3@40.138,9.684 U5.3@40.138,9.788 ; C15.2@42.418,11.938 42.418,11.934 42.639,11.713 42.79,11.713 45.486,9.017 46.101,9.017 46.863,8.255 46.863,5.842
  Top Layer w1: U5.3@40.138,9.788 40.138,11.231 40.845,11.938 C15.2@42.418,11.938 ; C15.2 C14.2
  Bottom Layer w0.3: v1(1.006,19.654) 0.973,19.687 0.973,30.61 1.143,30.78 v1(1.143,30.861) ; v1(12.827,28.321) 12.856,28.292 14.704,28.292 v1(14.733,28.264)
  Bottom Layer w0.75: v3(29.083,1.016) 29.09,1.009 35.342,1.009 v3(40.2,5.867)
+12V: D3.1 J10.1 Q1.2 | length 5.3
  Top Layer w1: Q1.2 40.892,22.098 D3.1
  other v1: 46.274,11.144 47.163,11.144 48.052,11.144 48.941,11.144 46.274,12.033 47.163,12.033 48.052,12.033 48.941,12.033 46.274,12.922 47.163,12.922 48.052,12.922 48.941,12.922 45.212,13.462 46.274,13.811 47.163,13.811 48.052,13.811 48.941,13.811 44.323,13.843 45.212,14.351 44.323,14.732 44.323,15.621 44.323,16.51 44.323,17.399 44.323,18.288 43.561,19.177 44.323,19.177 43.561,20.066 44.323,20.066
A: J1.2 R1.2 U2.1 U3.6 | length 12.2
  Top Layer w0.3: U3.6 36.718,3.302 37.238,2.782 R1.2 37.357,2.763 U2.1@40.858,2.763 ; 40.096,2.763 40.116,2.743 40.97,2.743 43.926,5.699 J1.2
B: J1.3 R2.2 U2.2 U3.7 | length 11.6
  Top Layer w0.3: U3.7 35.11,4.578 37.332,4.578 R2.2 U2.2@40.839,4.584 ; 40.077,4.584 40.116,4.623 40.945,4.623 43.021,6.699 J1.3
DE: U1.46 U3.3 | length 18.1
  Top Layer w0.2: U1.46 20.214,7.415 20.214,6.664 20.528,6.35 20.544,6.35 20.549,6.345 27.046,6.345 27.813,7.112 31.369,7.112 32.004,6.477 32.004,3.683 31.623,3.302 U3.3
FAULT: R12.2 U1.27 | length 15.2
  Top Layer w0.3: v1(3.937,21.082) 3.943,21.088 4.947,21.088 R12.2 ; v1(11.814,13.574) 11.895,13.574 12.269,13.2 U1.27
  Bottom Layer w0.3: v1(3.937,21.082) 3.937,20.367 10.745,13.559 11.799,13.559 v1(11.814,13.574)
GND: B1.2 BT1.2 C1.1 C2.1 C3.1 C4.1 C5.1 C6.1 C7.1 C8.1 C9.1 C10.1 C11.2 C12.1 C13.1 C14.1 C15.1 C16.1 C17.1 C18.2 C19.1 C20.1 C21.1 C22.1 CR1.2 D2.1 D3.2 J1.4 J2.1 J2.2 J2.3 J2.4 J2.5 J2.6 J2.A1/B12 J2.A12/B1 J10.2 JP1.1 R2.1 R3.2 R6.2 R7.1 R8.2 R9.2 R13.1 U1.8 U1.23 U1.35 U1.47 U2.3 U3.5 U4.1 U4.3 U4.4 U4.5 U4.6 U4.7 U4.30 U4.31 U4.32 U4.33 U4.34 U4.36 U5.1 X1.2 X1.4 | length 83.3
  Top Layer w0.2: U4.1 8.528,32.689 8.528,31.72 9.003,31.245 9.478,31.72 9.478,32.689 U4.3 U4.4 U4.5 U4.7 ; U4.36 8.528,42.169 8.528,43.297 8.715,43.484 8.978,43.484 v1@9.055,43.561 ; v1(9.017,43.561) 9.094,43.484 9.242,43.484 9.478,43.248 9.478,42.939 9.503,42.914 U4.34 U4.30
  Top Layer w0.254: v1(11.811,16.891) 11.817,16.885 12.821,16.885 C10.1 ; C7.1 12.889,8.45 13.638,9.198 14.427,9.198 U1.35 14.431,9.198 15.821,9.198 v1(15.875,9.144) ; C6.1 14.357,16.885 15.234,16.885 v1(15.24,16.891) ; U1.23 16.206,15.473 16.206,14.147 v1(16.256,14.097)
  Top Layer w0.3: v1(8.763,14.351) C5.1 ; v1(15.075,6.412) 15.075,6.331 15.2,6.206 B1.2 ; v1(20.701,8.763) 20.703,8.761 20.703,7.426 U1.47 ; v1(21.219,12.834) 21.276,12.777 21.276,12.581 21.632,12.225 U1.8@21.854,12.225
  Top Layer w0.5: v1(0.889,18.034) R6.2 ; v1(1.016,5.588) 1.019,5.591 1.994,5.591 R8.2 ; v1(1.016,8.509) 1.035,8.49 1.035,7.861 1.405,7.491 J2.6 ; v1(1.143,14.986) 1.155,14.998 1.155,15.761 1.525,16.131 J2.3 ; v1(1.778,8.509) 1.774,8.505 1.774,7.495 J2.6 ; v1(1.905,14.986) 1.893,14.998 1.893,16.009 J2.3 ; v1(2.54,8.509) 2.521,8.49 2.521,7.861 2.151,7.491 J2.6 ; v1(2.667,14.986) 2.648,15.005 2.648,15.688 2.205,16.131 J2.3 ; v1(5.207,17.145) 5.226,17.126 5.226,16.501 J2.1 5.707,16.131 6.077,16.501 6.077,17.126 v1(6.096,17.145) ; v1(5.334,6.477) 5.346,6.489 5.346,7.241 J2.2 5.714,7.491 6.084,7.121 6.084,6.489 v1(6.096,6.477) ; J2.A12/B1 5.981,8.701 6.893,8.701 6.958,8.636 v1(6.985,8.636) ; J2.A1/B12 5.977,14.917 6.962,14.917 v1(6.968,14.923) ; v1(8.052,11.446) 8.06,11.438 8.87,11.438 CR1.2@8.9,11.408 ; BT1.2 v1(9.525,24.003) ; v1(9.144,19.304) 9.163,19.323 9.163,19.592 9.664,20.093 C4.1 ; R9.2 v1(10.922,1.905) ; v1(12.739,6.437) 12.739,7.14 C7.1 ; v1(13.716,3.429) 13.716,2.667 JP1.1 14.478,2.667 v1(14.478,3.429) ; v1(15.214,45.219) 15.241,45.219 15.681,44.779 15.751,44.779 R7.1 ; C20.1@21.336,39.839 C20.1 ; v1(22.479,36.83) 22.46,36.849 21.786,36.849 21.336,37.299 C19.1 21.336,37.488 21.786,37.938 21.936,37.938 21.952,37.954 22.46,37.954 v1(22.479,37.973) ; v1(22.479,39.497) 22.46,39.516 21.698,39.516 C20.1 ; v1(22.479,40.513) 22.452,40.513 22.417,40.478 21.786,40.478 21.336,40.028 C20.1 ; R3.2 v1(24.765,5.08) ; C9.1 24.048,7.309 25.215,7.309 C13.1 25.278,7.256 26.64,7.256 v1(26.645,7.262) ; X1.4 25.766,11.088 25.766,11.333 v1@26.239,11.807 ; C3.1 v1(28.448,14.605) ; C2.1@28.956,11.799 28.962,11.805 29.966,11.805 v1(29.972,11.811) ; v1(32.512,8.636) 32.531,8.655 32.531,9.429 32.881,9.779 C16.1 33.032,9.779 33.382,9.429 33.382,8.655 v1(33.401,8.636) ; v1(33.782,2.54) 33.801,2.521 33.89,2.521 34.379,2.032 U3.5 ; v1(34.29,8.636) 34.296,8.63 34.296,7.499 C1.1 ; v1(34.29,9.398) 34.317,9.398 34.355,9.436 34.952,9.436 U5.1 ; R2.1 v1(37.338,6.858) ; v1(37.846,7.747) 37.865,7.766 38.226,7.766 38.501,8.041 38.601,8.041 38.751,8.191 C22.1 ; C21.1 38.725,6.867 38.725,5.979 v1(38.735,5.969) ; U2.3 v1(39.751,3.683) ; v1(40.894,15.875) 40.913,15.894 41.699,15.894 41.814,15.779 C14.1 41.814,16.479 41.351,16.479 41.339,16.491 40.913,16.491 v1(40.894,16.51)
  Top Layer w0.6: C15.1 C15.1@42.418,9.652 ; C15.1@42.418,9.436 42.418,8.203 42.922,7.699 J1.4 ; C15.1@42.554,9.706 v1@43.315,9.706 ; v1(43.321,9.712) 43.224,9.615 43.224,8.68 v1(43.18,8.636) v1(43.942,8.636)
  Top Layer w1: C19.1@21.336,37.488 C20.1@21.336,39.839
  other v1: 1.771,10.411 26.258,11.826 1.771,13.211 34.29,16.256 46.274,16.478 47.163,16.478 48.052,16.478 48.941,16.478 34.29,17.018 25.527,17.272 26.416,17.272 27.305,17.272 28.194,17.272 29.083,17.272 29.972,17.272 30.861,17.272 46.274,17.367 47.163,17.367 48.052,17.367 48.941,17.367 34.29,17.78 25.527,18.034 26.416,18.034 27.305,18.034 28.194,18.034 46.274,18.256 47.163,18.256 48.052,18.256 48.941,18.256 22.86,18.415 23.622,18.415 24.384,18.415 46.274,19.145 47.163,19.145 48.052,19.145 48.941,19.145 22.86,19.177 23.622,19.177 24.384,19.177 48.26,20.447 49.149,20.447 47.498,21.209 47.498,21.971 25.387,22.458 26.276,22.458 27.165,22.458 28.054,22.458 28.943,22.458 29.832,22.458 30.721,22.458 31.496,22.479 32.258,22.479 33.02,22.479 19.05,22.733 19.939,22.733 20.828,22.733 21.717,22.733 47.498,22.733 31.496,23.241 32.258,23.241 33.02,23.241 47.498,23.495 48.26,23.749 49.149,23.749 32.258,24.003 33.02,24.003 8.976,31.214 9.738,31.214 10.5,31.214 11.262,31.214 9.753,43.568 10.515,43.568 11.277,43.568
INA: U1.22 U4.15 | length 19.1
  Top Layer w0.2: 14.469,30.607 15.503,31.642 U4.15
  Top Layer w0.3: 14.469,30.607 13.843,29.981 13.843,19.431 16.704,16.57 U1.22
INB: U1.20 U4.22 | length 32
  Top Layer w0.2: U4.22 15.528,42.119 15.528,41.15 15.911,40.767 17.399,40.767 18.034,41.402
  Top Layer w0.3: v1(16.891,29.21) 16.81,29.21 16.66,29.06 16.636,29.06 16.256,28.68 16.256,18.923 17.704,17.475 U1.20 ; 18.034,41.402 v1(18.288,41.656)
  Bottom Layer w0.3: v1(16.891,29.21) 17.526,29.845 17.526,40.894 v1(18.288,41.656)
MCU_BOOT0: R3.1 U1.44 | length 5.1
  Top Layer w0.254: U1.44 19.206,7.423 19.206,5.94 20.047,5.099 R3.1@22.491,5.099
MCU_OSCIN: C2.2 U1.3 X1.1 | length 7
  Top Layer w0.2: U1.3 26.718,9.7 X1.1@27.432,10.414 ; X1.1 27.798,10.356 28.899,10.356 C2.2@28.956,10.299
MCU_OSCOUT: C3.2 U1.4 X1.3 | length 6.5
  Top Layer w0.2: U1.4 22.489,10.21 23.288,10.21 25.363,12.285 25.363,12.804 X1.3@25.556,12.998 ; X1.3 25.908,13.53 25.908,14.205 26.208,14.505 26.301,14.505 C3.2@26.301,14.605
NetBT1_1: BT1.1 R5.2 | length 2.3
  Top Layer w0.3: R5.2@12.688,21.717 12.688,23.991 BT1.1@12.7,24.003
NetC4_2: C4.2 R4.1 R5.1 U1.7 | length 21
  Top Layer w0.3: R4.1 R5.1 11.113,21.665 11.113,20.245 C4.2 11.234,20.123 12.135,20.123 v1(12.192,20.066) ; v1(19.939,13.97) 19.939,12.319 20.558,11.7 U1.7
  Bottom Layer w0.3: v1(12.192,20.066) 17.78,20.066 19.939,17.907 v1(19.939,13.97)
NetD1_K: D1.K R9.1 | length 1.5
  Top Layer w0.3: R9.1 D1.K
NetD4_2: D4.2 R12.1 | length 2.9
  Top Layer w0.3: D4.2 2.418,22.982 3.561,22.982 3.937,22.606 4.941,22.606 R12.1
NetD5_2: D5.2 R14.1 | length 2.8
  Top Layer w0.3: D5.2 2.671,25.658 3.688,25.658 3.951,25.92 R14.1
NetJ2_A5: J2.A5 R6.1 | length 6.5
  Top Layer w0.2: 4.699,13.556 J2.A5@5.966,13.556
  Top Layer w0.3: R6.1 3.29,16.676 4.064,15.902 4.064,13.83 4.339,13.556 4.699,13.556
NetJ2_B5: J2.B5 R8.1 | length 7.1
  Top Layer w0.2: 4.445,10.541 5.951,10.541 J2.B5
  Top Layer w0.3: R8.1@3.544,5.588 3.618,5.662 3.618,10.095 4.064,10.541 4.445,10.541
NetQ1_1: Q1.1 R13.2 | length 4.5
  Top Layer w1: Q1.1 42.414,27.434 42.414,26.684 44.33,24.768 R13.2@45.055,24.768
NetR7_2: R7.2 U4.20 | length 2.1
  Top Layer w0.2: R7.2@16.447,44.103 16.447,44.159 16.503,44.103 U4.20
NetR10_1: R10.1 U4.16 | length 3
  Top Layer w0.2: R10.1 15.467,29.958 15.801,30.293 15.801,31.374 15.978,31.551 15.978,32.689 U4.16
NetR11_1: R11.1 U4.21 | length 3.8
  Top Layer w0.2: R11.1 13.724,44.259 14.007,44.259 14.046,44.299 14.883,44.299 16.003,43.179 U4.21
OK: R14.2 U1.26 | length 20.8
  Top Layer w0.3: v1(3.965,27.417) 3.966,27.418 4.951,27.418 R14.2 ; v1(12.319,14.224) 12.4,14.224 12.783,13.842 13.209,13.842 13.351,13.7 U1.26
  Bottom Layer w0.3: v1(3.965,27.417) 4.022,27.359 4.266,27.359 6.477,25.149 6.477,18.818 11.071,14.224 v1(12.319,14.224)
OUTA: J6.1 U4.2 U4.8 U4.9 U4.10 U4.11 U4.12 U4.14 U4.38 U4.38_1 U4.38_2 U4.38_3 U4.38_4 U4.38_5 U4.38_6 | length 15.8
  Top Layer w0.2: U4.2 9.003,34.812 U4.38_6 ; U4.38_2 12.003,35.262 U4.8 U4.12 14.028,32.689 14.028,31.72 14.229,31.519 14.777,31.519 14.978,31.72 14.978,32.689 U4.14
  Top Layer w1: J6.1@5.334,34.544 J6.1@5.749,34.959 ; v1(5.77,34.959) J6.1@5.749,34.959 ; U4.38_6 9.487,35.612 6.334,35.612 5.749,35.027 J6.1@5.749,34.959
  other v1: 4.223,33.193 4.985,33.193 5.747,33.193 6.509,33.193 4.223,34.082 4.985,34.082 5.747,34.082 6.509,34.082 6.523,34.951 4.223,34.971 4.985,34.971 6.523,35.84 4.223,35.86 4.985,35.86 5.747,35.86
OUTB: J6.2 U4.23 U4.25 U4.26 U4.27 U4.28 U4.29 U4.35 U4.37 U4.37_1 U4.37_2 U4.37_3 U4.37_4 U4.37_5 U4.37_6 | length 16.9
  Top Layer w0.2: 8.818,39.219 9.003,39.404 U4.35 ; U4.37_1 12.003,39.596 12.003,42.069 12.04,42.107 12.078,42.144 U4.28 U4.27 U4.26 U4.25 14.028,42.169 14.028,43.138 14.229,43.339 14.777,43.339 14.978,43.138 14.978,42.169 U4.23
  Top Layer w1: J6.2@5.334,39.878 J6.2@5.72,39.878 ; v1(5.72,39.438) 5.957,39.201 9.442,39.201 U4.37_5 U4.37@9.645,39.219 ; U4.37@9.637,39.395 10.153,38.879 U4.37
  other v1: 4.196,38.549 4.958,38.549 5.72,38.549 6.482,38.549 4.196,39.438 4.958,39.438 6.482,39.438 4.196,40.327 4.958,40.327 5.72,40.327 6.482,40.327 4.196,41.216 4.958,41.216 5.72,41.216 6.482,41.216
PWM: U1.21 U4.17 | length 18.4
  Top Layer w0.2: U4.17 16.503,30.995 16.505,30.993
  Top Layer w0.3: 16.505,30.993 16.505,29.84 15.494,28.829 15.494,18.669 17.204,16.959 U1.21
RE: U1.45 U3.2 | length 16.4
  Top Layer w0.2: U1.45 19.714,7.415 19.714,6.448 20.246,5.916 27.379,5.916 28.067,6.604 31.091,6.604 31.564,6.131 31.564,4.689 31.447,4.572 U3.2
SWCLK: B1.1 JP1.3 U1.37 | length 6.2
  Top Layer w0.254: U1.37@15.706,6.777 15.708,6.775 B1.1@15.708,5.71 ; B1.1@15.74,5.682 16.543,5.682 19.04,3.185 19.04,2.781 19.281,2.54 JP1.3@19.304,2.54
SWDIO: B1.4 JP1.2 U1.34 | length 11.9
  Top Layer w0.254: U1.34 14.427,9.698 13.254,9.698 11.938,8.382 11.938,6.35 14.105,4.183 14.74,4.183 ; B1.4@14.713,4.556 14.713,4.183 16.356,2.54 JP1.2@16.764,2.54
USART3_RX: U1.43 U3.1 | length 14.6
  Top Layer w0.3: U1.43 18.704,5.553 20.099,4.158 27.018,4.158 28.587,5.727 30.059,5.727 U3.1
USART3_TX: U1.42 U3.4 | length 15.6
  Top Layer w0.3: U1.42 18.204,5.037 19.702,3.539 26.999,3.539 28.506,2.032 U3.4
USB_D_CON_N: CR1.4 U1.32 | length 12.5
  Top Layer w0.279: CR1.4 11.792,10.62 12.463,10.62 12.813,10.97 v2(12.954,10.97) ; U1.32 14.443,10.686 15.25,10.686 15.283,10.653 15.96,10.653 16.054,10.747 16.83,10.747 17.19,10.387 17.553,10.387 v2(17.653,10.287)
  Bottom Layer w0.279: v2(12.954,10.97) 13.095,10.97 13.352,11.227 18.11,11.227 18.542,10.795 18.542,10.287 18.288,10.033 18.034,10.033 17.78,10.287 v2(17.653,10.287)
USB_D_CON_P: CR1.6 U1.33 | length 14
  Top Layer w0.279: CR1.6 11.792,12.24 12.463,12.24 12.813,11.89 v2(12.954,11.89) ; U1.33 14.443,10.214 15.25,10.214 15.283,10.247 16.128,10.247 16.222,10.341 16.662,10.341 16.903,10.1 16.903,9.736 v2(17.002,9.636)
  Bottom Layer w0.279: v2(12.954,11.89) 13.095,11.89 13.352,11.633 18.278,11.633 18.948,10.963 18.948,10.119 18.456,9.627 17.012,9.627 v2(17.002,9.636)
USB_D_N: CR1.3 J2.A7 J2.B7 | length 6.2
  Top Layer w0.279: J2.B7 5.967,12.557 5.352,12.557 5.132,12.337 5.132,11.285 5.352,11.065 5.967,11.065 J2.A7 5.975,11.065 6.59,11.065 6.633,11.108 7.207,11.108 7.231,11.132 7.461,11.132 8.015,10.579 8.823,10.579 CR1.3
USB_D_P: CR1.1 J2.A6 J2.B6 | length 3.8
  Top Layer w0.279: J2.B6 5.975,11.557 6.59,11.557 6.633,11.514 7.039,11.514 7.063,11.538 7.239,11.538 8.015,12.313 8.855,12.313 CR1.1 ; J2.B6@5.99,11.58 J2.A6@5.99,12.042
VIN: C11.1 C18.1 C19.2 C20.2 D2.3 Q1.3 U4.13 U4.24 U4.39 U4.39_1 U4.39_2 U4.39_3 U4.39_4 U4.39_5 U4.39_6 U4.39_7 U4.39_8 U4.39_9 U4.39_10 U4.39_11 U4.39_12 | length 42.9
  Top Layer w0.2: U4.13 14.503,37.154 U4.39 ; U4.39@14.503,39.56 U4.24
  Top Layer w1: U4.39_5 U4.39_1 ; U4.39@15.875,39.271 18.593,39.271 19.05,39.728 C20.2 ; C11.1 18.92,27.55 18.92,29.525 19.038,29.643 v1@19.038,33.516 ; C20.2@18.923,39.601 18.923,37.338 19.05,37.211 v1(19.05,34.29) v1(19.05,33.528) ; C11.1@19.177,27.426 C18.1 32.215,27.426 v1(32.238,27.403) 34.333,27.403 34.356,27.426 37.342,27.426 37.592,27.676 Q1.3
  other v1: 18.669,26.035 19.685,26.035 20.574,26.035 21.463,26.035 22.352,26.035 24.384,26.035 25.273,26.035 26.162,26.035 27.051,26.035 27.94,26.035 28.829,26.035 29.718,26.035 39.09,26.249 32.258,26.67 39.116,27.178 39.116,28.067 32.245,28.105 20.574,28.829 21.59,28.829 22.606,28.829 23.495,28.829 24.384,28.829 25.273,28.829 26.162,28.829 32.258,28.829 33.401,28.829 34.29,28.829 35.306,28.829 39.116,28.956 21.59,29.718 20.955,30.353 20.32,30.988 19.177,38.608
pads on no net: B1.3 B1.5 B1.6 D2.2 J1.S1 J1.S2 J2. J2.A8 J2.B8 U1.2 U1.5 U1.6 U1.10 U1.11 U1.12 U1.13 U1.14 U1.15 U1.16 U1.17 U1.18 U1.19 U1.25 U1.28 U1.29 U1.30 U1.31 U1.38 U1.39 U1.40 U1.41 U4.18 U4.19

## Polygon pours and split planes (outlines as drawn)
GND on Top Layer "GND_L01_P014" (solid, pour order 14): 9.478,43.248 8.669,43.248 8.669,43.196 8.636,43.215 8.669,43.196 8.669,42.256 8.669,41.275 8.636,41.275 8.255,41.275 8.255,43.942 10.16,43.942 9.478,43.26
GND on Top Layer "GND_L01_P013" (solid, pour order 13): 9.525,31.496 8.674,31.496 8.674,33.655 8.001,33.655 8.001,30.734 9.525,30.734
GND on Top Layer "GND_L01_P012" (solid, pour order 12): 9.338,32.342 9.338,30.885 9.525,30.734 11.303,30.734 11.557,30.988 11.557,33.401 11.303,33.655 9.525,33.655 9.338,33.541
GND on Top Layer "GND_L01_P011" (solid, pour order 11): 9.398,42.859 9.398,41.148 9.525,41.021 11.303,41.021 11.43,41.148 11.43,43.815 11.303,43.942 9.525,43.942 9.398,43.815
+12V on Top Layer "+12V_L01_P009" (solid, pour order 9): 49.911,10.414 45.593,10.414 45.466,10.541 45.466,12.065 43.561,13.97 43.561,17.145 42.926,17.78 36.449,17.78 36.195,18.034 36.195,24.384 42.926,24.384 42.926,23.241 43.942,23.241 45.466,23.241 45.466,21.209 44.958,20.532 44.958,15.748 45.847,14.859 49.911,14.859
GND on Top Layer "GND_L01_P008" (solid, pour order 8): 46.99,25.4 46.99,20.955 45.847,19.812 45.72,19.812 45.72,15.875 49.784,15.875 49.784,25.4
GND on Top Layer "GND_L01_P006" (solid, pour order 6): 17.78,18.669 18.542,17.907 21.59,17.907 22.733,16.764 31.242,16.764 32.385,15.621 34.29,15.621 34.798,16.129 34.798,21.717 34.036,22.479 34.036,25.273 33.782,25.527 33.02,25.527 30.607,23.114 18.669,23.114 17.78,22.225
GND on Top Layer "GND_L01_P005" (solid, pour order 5): 32.004,10.16 32.004,8.001 33.147,6.858 34.671,6.858 34.798,6.985 34.798,8.763 35.052,9.017 36.195,9.017 36.449,9.271 36.449,10.414 36.195,10.668 32.512,10.668
GND on Top Layer "GND_L01_P004" (solid, pour order 4): 27.305,15.113 27.178,14.986 27.178,13.97 27.051,13.843 26.797,13.843 26.67,13.716 26.67,12.192 26.797,12.065 27.94,12.065 28.448,11.557 28.448,11.303 28.575,11.176 29.464,11.176 29.591,11.303 29.591,12.319 29.464,12.446 28.321,12.446 28.067,12.7 28.067,14.986 27.94,15.113
OUTA on Top Layer "OUTA_L01_P003" (solid, pour order 3): 3.81,32.512 6.858,32.512 6.858,34.163 11.303,34.163 11.811,33.655 11.811,31.623 14.155,31.623 14.155,34.036 13.462,34.036 12.446,35.052 12.446,36.957 3.81,36.957 3.81,36.449
OUTB on Top Layer "OUTB_L01_P002" (solid, pour order 2): 3.81,41.91 3.81,37.846 12.573,37.846 12.573,40.005 13.589,41.021 13.97,41.021 14.224,41.275 14.224,43.143 14.06,43.307 12.065,43.307 11.811,43.053 11.811,41.148 10.795,40.132 6.858,40.132 6.858,41.91
VIN on Top Layer "VIN_L01_P000" (solid, pour order 0): 13.462,34.671 17.526,34.671 17.78,34.417 17.78,25.654 32.004,25.654 32.766,26.416 36.068,26.416 36.83,25.654 39.37,25.654 39.624,25.908 39.624,29.337 39.37,29.591 22.225,29.591 19.939,31.877 19.939,40.513 19.685,40.767 18.415,40.767 17.653,40.005 13.081,40.005 13.208,39.878 13.208,34.925 13.208,39.878 13.208,34.925
+12V on Top Solder "+12V_L01_P010" (solid, pour order 10): 49.911,10.414 45.593,10.414 45.466,10.541 45.466,12.065 43.561,13.97 43.561,17.145 42.926,17.78 36.449,17.78 36.195,18.034 36.195,24.384 42.926,24.384 42.926,23.241 43.942,23.241 45.466,23.241 45.466,21.209 44.958,20.532 44.958,15.748 45.847,14.859 49.911,14.859
VIN on Top Solder "NONET_L01_P001" (solid, pour order 1): 13.462,34.671 17.526,34.671 17.78,34.417 17.78,25.654 32.258,25.654 32.893,26.289 36.195,26.289 36.83,25.654 39.37,25.654 39.624,25.908 39.624,29.337 39.243,29.718 22.098,29.718 19.939,31.877 19.939,40.513 19.685,40.767 18.415,40.767 17.653,40.005 13.081,40.005 13.208,39.878 13.208,34.925 13.208,39.878 13.208,34.925
GND on Bottom Layer "GND_L02_P015" (solid, pour order 15): 0.127,46.609 0.127,1.905 1.905,0.127 48.641,0.127 50.165,1.651 50.165,28.575 48.768,29.972 22.987,29.972 22.987,46.609 21.717,47.879 1.397,47.879 21.717,47.879 1.397,47.879

## Silkscreen, mask and mechanical layers (free items; w line width, h text height)
Top Overlay:
  drawing of 76 lines, arcs and shapes, not listed
  text "www.steamforvietnam.org" at 3.79,45.819 h1.5
  text "R11" at 11.303,44.45 h1.4 r315
  text "R7" at 14.534,44.245 h1.4 r315
  text "M1" at 4.445,42.291 h1.8
  text "C20" at 18.923,41.17 h1.8
  text "C19" at 20.066,34.947 h1.8
  text "M2" at 4.264,31.177 h1.8
  text "Motor Driver V1.0" at 0.604,29.356 h2
  text "OK" at 6.963,25.654 h1.8 r90
  text "RESET" at 8.255,25.654 h1.8
  text "R13" at 47.625,24.257 h1.8
  text "D2" at 33.528,23.241 h1.8
  text "FAULT" at 6.985,19.685 h1.8 r90
  text "C4" at 9.525,18.437 h1.8
  text "C11" at 20.32,17.929 h1.8
  text "C18" at 29.21,17.932 h1.8
  text "C10" at 13.263,17.463 h1.4 r90
  text "C6" at 14.717,17.448 h1.4 r90
  text "-" at 46.274,17.367 h3 r90
  text "C3" at 26.035,15.389 h1.8
  text "C5" at 9.374,15.006 h1.8
  text "C17" at 31.855,14.097 h1.8 r90
  text "C2" at 29.518,12.696 h1.8 r90
  text "+" at 44.196,10.299 h3
  text "C16" at 31.849,10.033 h1.8 r90
  text "CR1" at 9.144,8.658 h1.8
  text "C22" at 40.758,7.898 h1.2
  text "0V" at 42.911,7.375 h1.2
  text "C1" at 32.173,7.07 h1.8
  text "C7" at 10.476,6.806 h1.8
  text "C13" at 27.156,6.731 h1.8 r90
  text "C21" at 40.758,6.579 h1.2
  text "B" at 43.164,6.35 h1.2
  text "A" at 43.165,5.461 h1.2
  text "R3" at 25.019,4.572 h1.8
  text "POWER" at 6.985,4.445 h1.6
  text "5V" at 42.917,4.384 h1.2
  text "DIO" at 16.742,3.94 h1.6 r45
  text "CLK" at 19.29,3.824 h1.6 r45
  text "D1" at 6.011,2.887 h1.8
  text "G" at 12.051,1.665 h1.6 r45
  text "5V" at 23.876,1.651 h1.6 r45
  text "R9" at 5.757,1.363 h1.8
  text "RS485" at 44.45,1.016 h1.8
  text "U2" at 39.077,0.867 h1.8
Mechanical 13:
  lines w0.254: 0.127,1.905 1.905,0.127 48.641,0.127 49.108,0.594 49.66,1.146 50.127,1.613 50.127,28.613 48.74,30 23.019,30 23.019,46.577 21.717,47.879 20.126,47.879 6.925,47.879 1.397,47.879 0.127,46.609 0.127,1.905 ; 1.016,32.988 ccw(c2.016,32.988) 2.016,31.988 2.175,31.988 ccw(c2.175,32.988) 3.175,32.988 3.175,41.91 ccw(c2.175,41.91) 2.175,42.91 2.016,42.91 ccw(c2.016,41.91) 1.016,41.91 1.016,32.988

## Text inside footprints (layer, text, board x,y; h text height)
CR1: Top Overlay "*" at 7.747,12.954 h1.27; Mechanical 13 "*" at 8.382,12.827 h1.27
D1: Mechanical 13 "+" at 10.588,4.037 h0.5